# EAGLE board vibrator_brick (EAGLE 7.2.0)
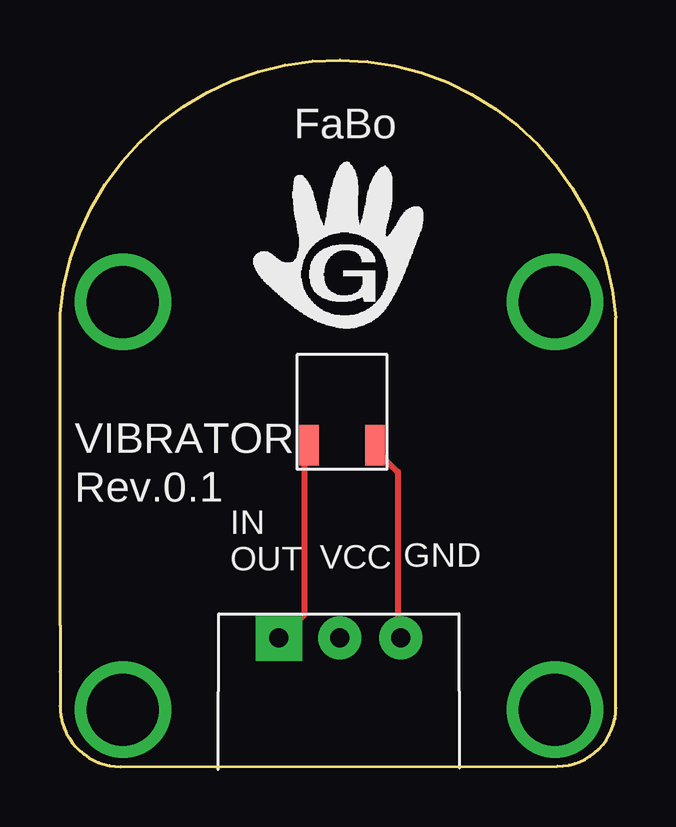
[diagram p0: board, top side]
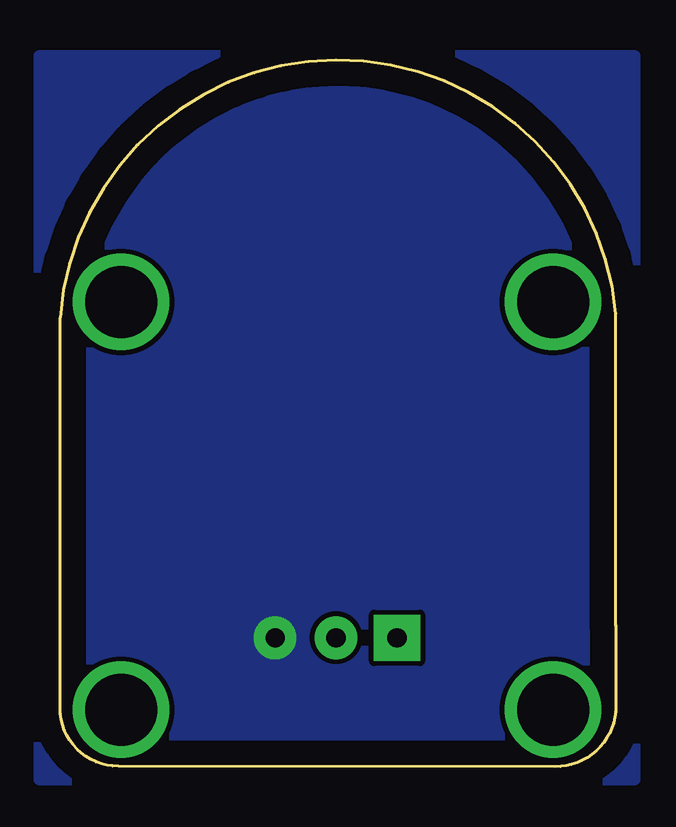
[diagram p1: board, bottom side, seen from below]

Size 23.16 x 29.47 mm. Coordinates in mm from the lower left corner, seen from the top.
Copper layers (1*16): Top 0.035mm / dielectric 1.5mm / Bottom 0.035mm
Design rules "default": minimum track width 10mil, minimum drill 24mil, track to track 8mil, track to pad 8mil, pad to pad 8mil, via to via 8mil, smd to smd 8mil, copper to edge 40mil, drill to drill 8mil, minimum pad ring 10mil, minimum via ring 8mil, stop-mask expansion 4mil, vias tented up to drill 0mil, thermal gap 10mil

## Footprints (pad centres in the part's own frame; a part is rotated, then mirrored left to right if it is on the bottom)
VIBRATOR-LA3R5-480H1 = smd 0.813 x 1.676: P$1 -2.27,0; P$2 0.5,0
BRICK_3PIN = drill 0.8 pad 1.778: GND 2.58,-6; VCC 0.04,-6 | drill 0.8 pad 1.93 square: IN/OUT -2.5,-6 | drill 3 pad 3.81: P$1 -9,8; P$2 9,8; P$3 9,-9; P$4 -9,-9

## Placement (x,y rotation side)
U$1  VIVRATOR-LA3R5-480H1  [VIBRATOR-LA3R5-480H1]  12.63,13.41 0 top
U$2  BRICK-3PIN  [BRICK_3PIN]  11.62,11.38 0 top

## Library data of the parts
U$1 U$2 = gclue

## Nets
GND: U$1.P$2 U$2.GND
N$1: U$1.P$1 U$2.IN/OUT

## Tracks (layer width: path | path; a pad name or v marks a point on that pad's centre or on a via)
GND
  Top 0.254: U$2.GND 14.08,5.43 14.08,12.29 13.17,13.21 U$1.P$2
  pour Bottom (no thermals): -0.83,29.66 24.06,29.66 24.06,-0.56 -0.83,-0.56
N$1
  Top 0.254: U$1.P$1 10.2,13.21 10.2,6.35 9.28,5.43 U$2.IN/OUT

## Text on the board
tPlace: VIBRATOR | Rev.0.1